# Altium PCB MB784.PCBDOC (part 3 of 4)
Units mil, origin at the board's own origin, x right, y up, seen from the top; angles counter-clockwise.
Board outline 4505 x 6805 mil, 4 copper layers (TopLayer, GND, S1, BottomLayer); 363 components, 323 nets, 1564 pads, 534 vias.
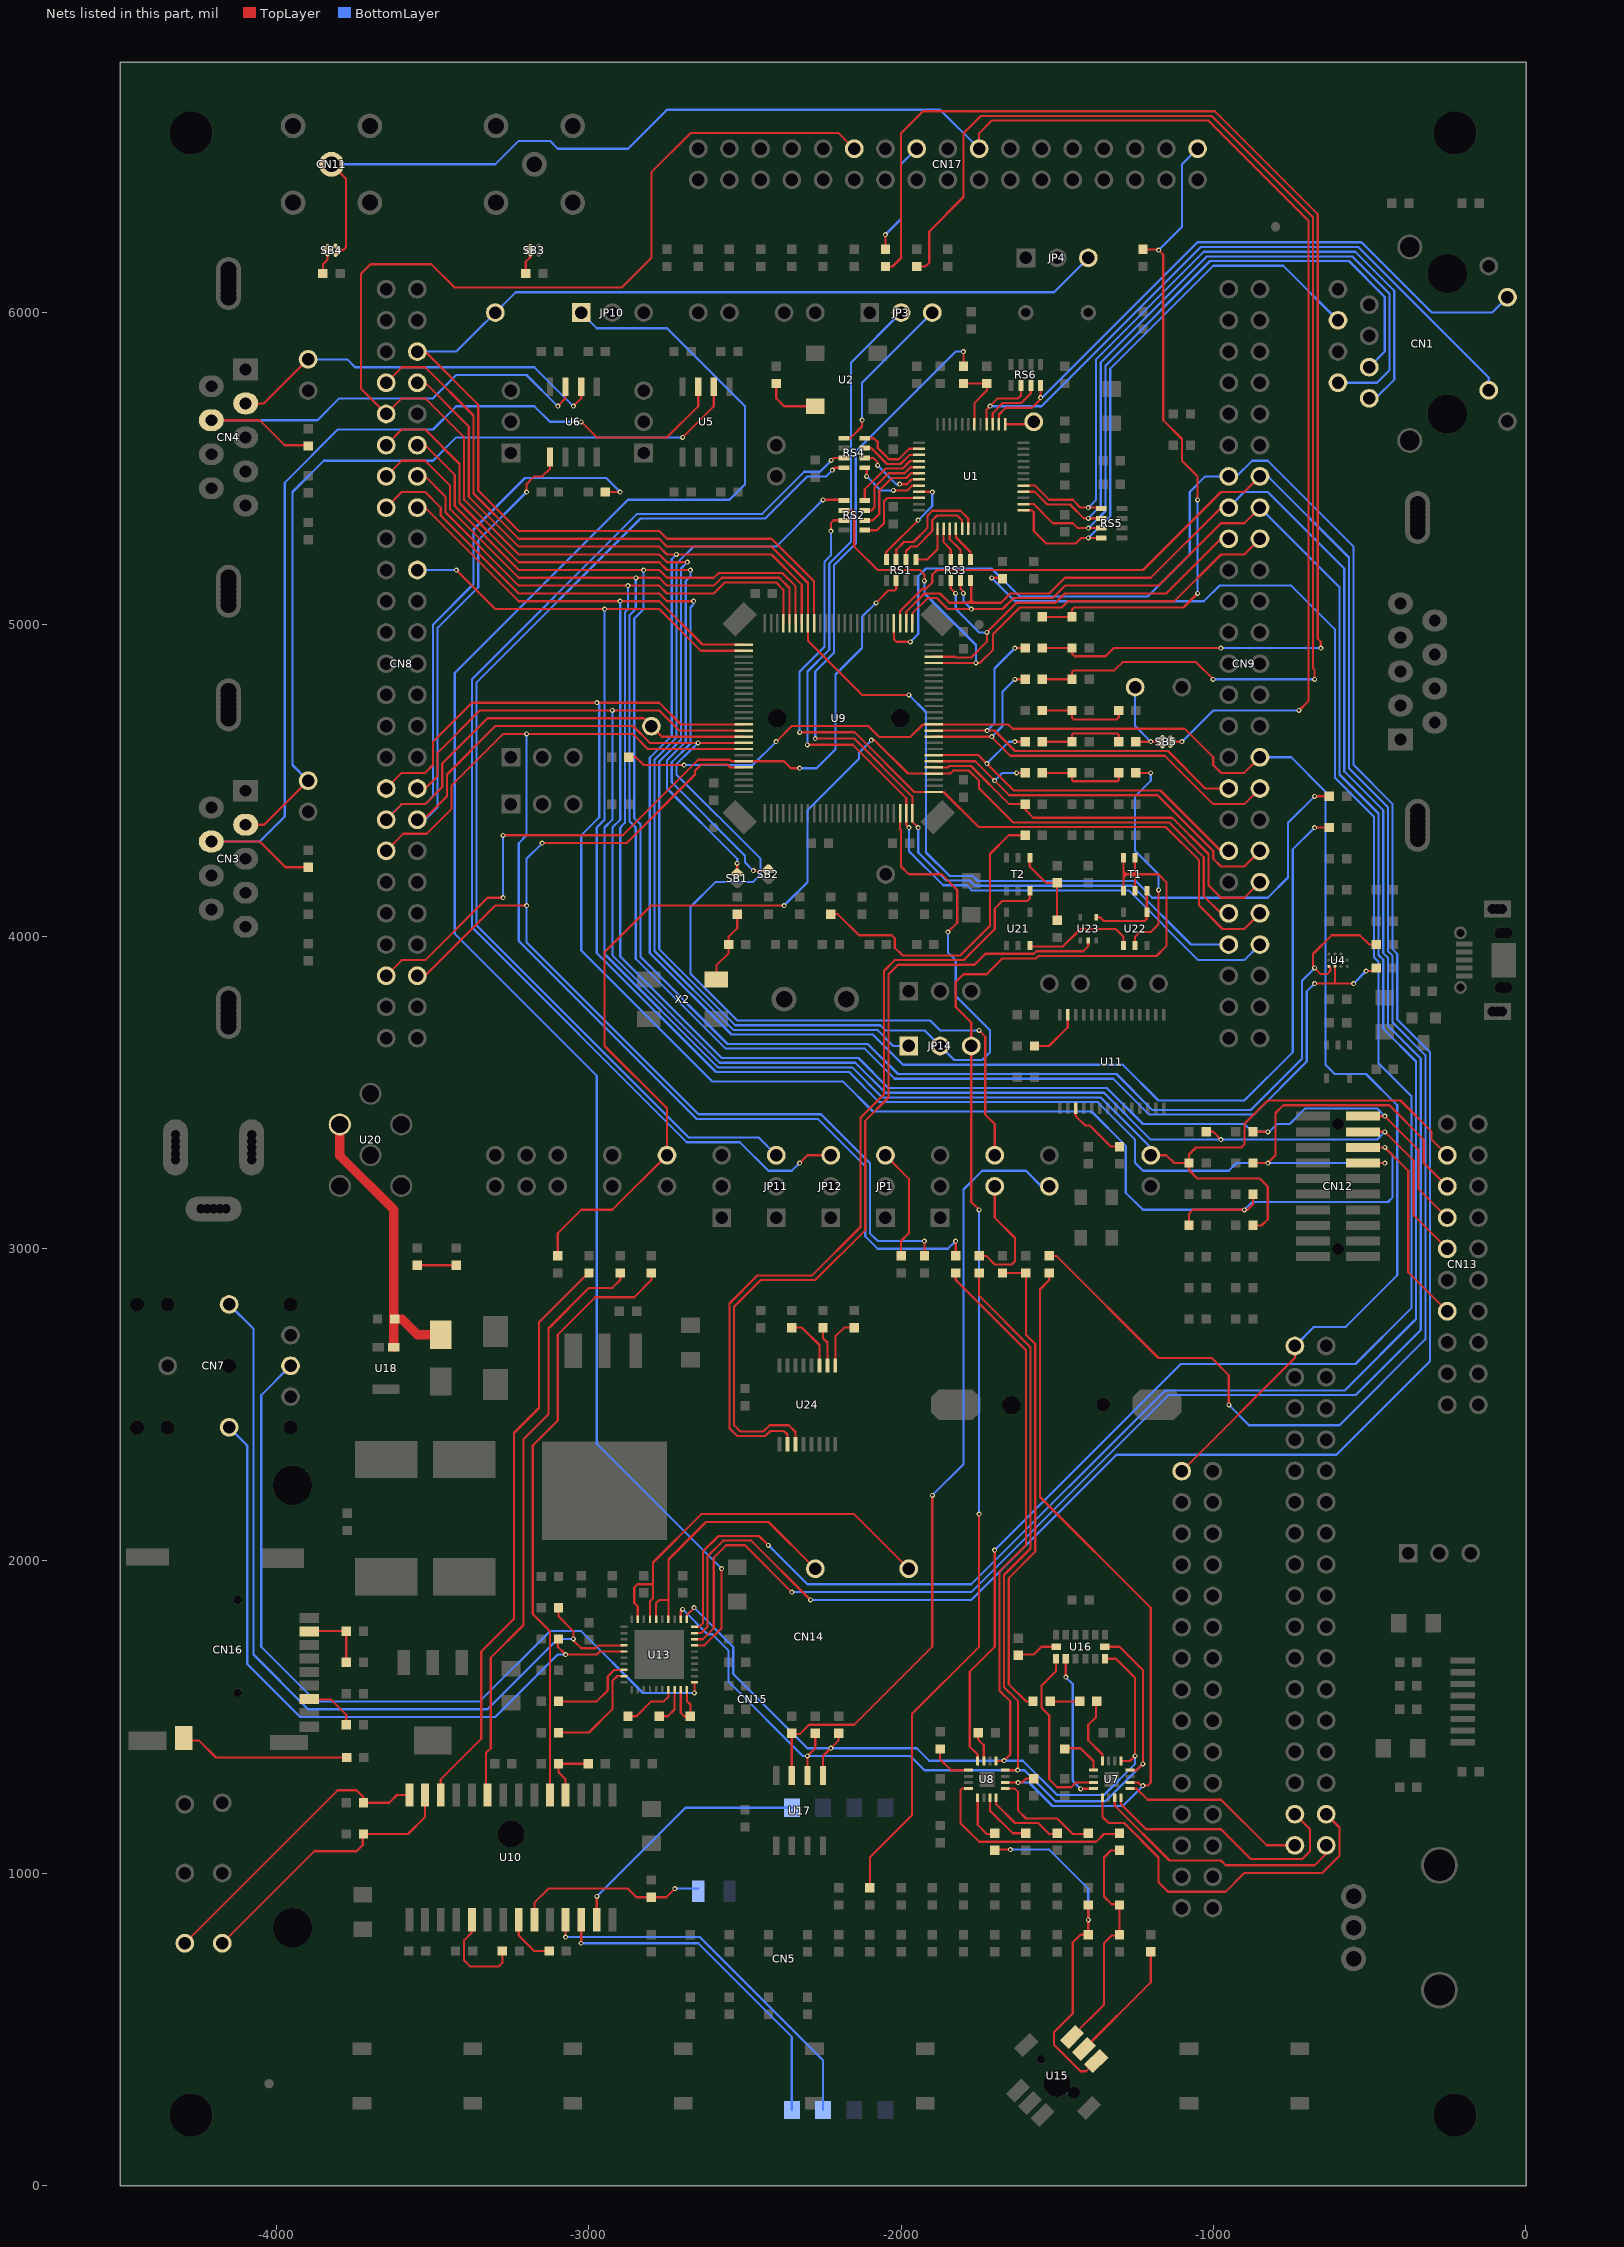
[diagram p5: the nets of this part, all layers, seen from the top]

## Via types
v1: diameter 16, hole 8, TopLayer to BottomLayer, tented both sides, 534 vias

## Nets (pads, with @x,y where several pads share a name; then routed paths per layer and width w, separated by ;. In a path a pad name is that pad's centre, name@x,y a point inside that pad or via, vN(x,y) a via of type N, cw(c..) or ccw(c..) an arc to the next point about the centre after c; other vN are vias at no path point) (continued)
NetR101_1: C55.2 R92.1 R101.1 U15.4 | length 1140.9
  TopLayer w7: R101.1@-1697.5,1075 v1(-1650,1075) ; C55.2@-1400,897.5 R92.1@-1400,802.5 -1425,802.5 -1450,777.5 -1450,550 -1510,490 -1510,450 -1425,365 -1407.05,365 U15.4@-1374.73,397.33
  BottomLayer w7: v1(-1650,1075) -1525,1075 -1400,950 v1(-1400,850)
NetR102_1: C56.2 R93.1 R102.1 U15.6 | length 737.3
  TopLayer w7: U15.6@-1452.67,475.27 -1350,577.95 -1350,775 -1325,800 R93.1@-1302.5,800 ; C56.2@-1302.5,900 -1325,900 -1350,925 -1350,1050 -1327.5,1072.5 R102.1@-1300,1072.5 ; R93.1@-1300,802.5 C56.2@-1300,897.5
NetR103_2: C60.2 R86.1 R103.2 | length 295
  TopLayer w7: R103.2@-1547.5,4725 C60.2@-1452.5,4725 -1452.5,4702.5 -1446.5,4696.5 -1308.5,4696.5 -1302.5,4702.5 R86.1@-1302.5,4725
NetR105_2: JP1.3 R105.2 | length 363.9
  TopLayer w7: JP1.3@-2050,3300 -1975,3225 -1975,3050 -2000,3025 R105.2@-2000,2977.5
NetR108_2: R108.2 U15.5 | length 399.7
  TopLayer w7: U15.5@-1413.7,436.3 -1200,650 R108.2@-1200,747.5
NetR112_1: R112.1 SB3.2 | length 81
  TopLayer w7: R112.1@-3202.5,6125 -3202.5,6162.5 -3188,6177 SB3.2@-3188,6200
NetR131_1: R131.1 R134.2 U7.4 U8.4 U13.2 U16.14 U17.6 | length 4274
  TopLayer w7: U13.2@-2706.1,1812.99 -2706.1,1838.9 v1(-2700,1845) ; U17.6@-2300,1312.5 v1(-2300,1375) -2275,1400 R134.2@-2275,1447.5 ; R131.1@-1750,2922.5 -1750,2850 -1585,2685 -1585,2040 -1670,1955 -1670,1595 -1625,1550 v1@-1625,1331.21 ; U8.4@-1666.26,1329.53 v1(-1626.69,1329.53) ; U16.14@-1347.24,1725 -1300,1725 -1225,1650 v1(-1225,1350) -1245.47,1329.53 U7.4@-1266.26,1329.53
  BottomLayer w7: v1(-2700,1845) -2620,1765 -2605,1765 -2552.5,1712.5 -2552.5,1612.5 -2315,1375 -1970.47,1375 -1925,1329.53 -1604.53,1329.53 -1505,1230 -1345,1230 v1(-1225,1350)
NetR131_2: JP9.2 R131.2 | length 397.5
  TopLayer w7: R131.2@-1750,2977.5 -1727.5,2977.5 -1700,2950 -1645,2950 -1635,2960 -1635,3035 -1700,3100 JP9.2@-1700,3200
NetR132_1: R132.1 R133.2 U7.5 U8.5 U13.1 U16.13 U17.5 | length 4143.2
  TopLayer w7: U13.1@-2686.42,1812.99 -2686.42,1826.71 v1(-2663.13,1850) ; U17.5@-2250,1312.5 -2250,1375 -2200,1425 R133.2@-2200,1447.5 ; R132.1@-1825,2922.5 -1825,2900 -1600,2675 -1600,2050 -1685,1965 -1685,1585 -1650,1550 -1650,1380 v1(-1670,1360) ; U8.5@-1695.47,1358.74 v1@-1671.26,1358.74 ; U16.13@-1346.26,1686.61 -1311.61,1686.61 -1250,1625 v1(-1250,1375) -1266.26,1358.74 U7.5@-1295.47,1358.74
  BottomLayer w7: v1(-2663.13,1850) -2537.5,1724.37 -2537.5,1637.5 -2300,1400 -1950,1400 -1910,1360 -1610,1360 -1500,1250 -1350,1250 -1250,1350 v1(-1250,1375)
  other v1: -2225,1400
NetR135_2: CN16.7 R135.2 | length 172.2
  TopLayer w7: CN16.7@-3896.65,1557.09 -3870,1557.09 -3868.42,1555.51 -3825.51,1555.51 -3777.5,1507.5 R135.2@-3777.5,1475
NetR136_1: CN16.2 R136.1 R138.1 | length 217.8
  TopLayer w7: CN16.2@-3895.28,1775 R136.1@-3777.5,1775 R138.1@-3777.5,1675
NetR137_2: CN16.10 R137.2 | length 551.4
  TopLayer w7: CN16.10@-4305,1425 -4250,1425 -4195,1370 R137.2@-3776.34,1370
NetR144_2: CN17.19 R144.2 | length 363.9
  TopLayer w7: R144.2@-2050,6202.5 v1(-2050,6250)
  BottomLayer w7: v1(-2050,6250) -2000,6300 -2000,6475 CN17.19@-1950,6525
NetR146_1: C61.2 CN17.1 R139.1 R146.1 | length 2121.3
  TopLayer w7: R139.1@-1547.5,5025 C61.2@-1452.5,5025 -1452.5,5047.5 -1445,5055 -1095,5055 v1(-1050,5100) ; R146.1@-1225,6202.5 -1177.5,6202.5 -1160,6185 -1160,5655 -1100,5595 -1100,5525 -1050,5475 v1(-1050,5400)
  BottomLayer w7: v1(-1175,6200) -1100,6275 -1100,6475 CN17.1@-1050,6525 ; v1(-1050,5100) v1(-1050,5400)
NetR148_1: LD7.1 R148.1 | length 125
  TopLayer w7: LD7.1@-3550,2947.5 R148.1@-3425,2947.5
NetR149_2: C78.1 R79.1 R149.2 | length 293.3
  TopLayer w7: R79.1@-1547.5,4525 C78.1@-1452.5,4525 -1452.5,4502.5 -1448.5,4498.5 -1306.5,4498.5 -1302.5,4502.5 R149.2@-1302.5,4525
NetR150_1: R150.1 R151.2 R154.2 | length 1540.4
  TopLayer w7: R150.1@-1675,2922.5 R154.2@-1600,2922.5 -1600,2725 -1570,2695 -1570,2030 -1655,1945 -1655,1605 -1600,1550 R151.2@-1577.5,1550
NetR151_1: R151.1 R163.2 | length 95
  TopLayer w7: R151.1@-1522.5,1550 R163.2@-1427.5,1550
NetR156_1: R156.1 R157.2 T2.4 | length 257.5
  TopLayer w7: T2.4@-1587.6,4253.15 -1587.6,4225 -1535.1,4172.5 R157.2@-1500,4172.5 R156.1@-1500,4052.5
NetR160_1: R159.2 R160.1 U7.2 U8.2 | length 2421.2
  TopLayer w7: U8.2@-1666.26,1290.16 v1@-1625,1290.16 ; v1(-1625,1290) -1612.5,1290 -1600,1302.5 R160.1@-1575,1302.5 ; R159.2@-1525,2922.5 -1525,2900 -1555,2870 -1555,2205 -1200,1850 -1200,1290 -1210,1280 -1230,1280 -1240.16,1290.16 U7.2@-1266.26,1290.16 U7.2@-1266.1,1290
  BottomLayer w7: v1(-1625,1290) -1590,1290 -1515,1215 -1290,1215 v1(-1225,1280)
NetR162_2: R8.1 R162.2 U1.30 | length 221.8
  TopLayer w7: R162.2@-1800,5772.5 R8.1@-1725,5772.5 -1725,5750 -1765.16,5709.84 U1.30@-1765.16,5642.32
NetR164_1: R164.1 U8.7 | length 98.6
  TopLayer w7: R164.1@-1752.5,1450 -1752.5,1427.5 -1734.84,1409.84 U8.7@-1734.84,1358.74
NetR165_2: R85.2 R165.2 | length 989.2
  TopLayer w7: R165.2@-2225,4072.5 -2202.5,4072.5 -2135,4005 -2030,4005 -2020,3995 -2020,3965 -1995,3940 -1810,3940 -1715,4035 -1715,4265 -1655,4325 R85.2@-1602.5,4325
NetR167_2: C65.2 R143.1 R167.2 | length 4196.5
  TopLayer w7: R143.1@-1950,6147.5 -1922.5,6147.5 -1910,6160 -1910,6260 -1800,6370 -1800,6575 -1745,6630 -1005,6630 -680,6305 -680,4860 -675,4855 v1(-675,4825) ; R167.2@-1547.5,4825 C65.2@-1452.5,4825 -1452.5,4847.5 -1446.5,4853.5 -1316.5,4853.5 -1290,4880 -1055,4880 v1(-1000,4825)
  BottomLayer w7: v1(-1000,4825) v1(-675,4825)
NetR168_2: C66.2 R144.1 R168.2 | length 4280.9
  TopLayer w7: R144.1@-2050,6147.5 -2027.5,6147.5 -2000,6175 -2000,6575 -1930,6645 -995,6645 -665,6315 -665,4955 -655,4945 v1(-655,4925) ; R168.2@-1547.5,4925 C66.2@-1452.5,4925 -1452.5,4907.5 -1443.5,4898.5 -1345,4898.5 -1318.5,4925 v1(-975,4925)
  BottomLayer w7: v1(-975,4925) v1(-655,4925)
NetR169_2: C64.2 R141.1 R169.2 | length 292.7
  TopLayer w7: R169.2@-1547.5,4625 C64.2@-1452.5,4625 -1452.5,4647.5 -1448.5,4651.5 -1307.5,4651.5 -1302.5,4646.5 R141.1@-1302.5,4625
NetRS1_1: RS1.1 U1.1 | length 149.2
  TopLayer w7: RS1.1@-1952.76,5208.5 -1916.5,5208.5 -1883.27,5241.73 U1.1@-1883.27,5307.68
NetRS1_3: RS1.3 U1.5 | length 308.1
  TopLayer w7: RS1.3@-1984.25,5208.5 -1984.25,5235.75 -1970,5250 -1950,5250 -1900,5300 -1900,5335 -1885,5350 -1820,5350 -1804.53,5334.53 U1.5@-1804.53,5307.68
NetRS1_5: RS1.5 U1.6 | length 380.2
  TopLayer w7: RS1.5@-2015.75,5208.5 -2015.75,5240 -1990.75,5265 -1960,5265 -1915,5310 -1915,5350 -1900,5365 -1810,5365 -1784.84,5339.84 U1.6@-1784.84,5307.68
NetRS1_7: RS1.7 U1.45 | length 320.1
  TopLayer w7: RS1.7@-2047.24,5208.5 -2047.24,5232.76 v1(-1945,5335) ; U1.45@-1942.32,5425.79 -1900.79,5425.79 v1(-1900,5425)
  BottomLayer w7: v1(-1945,5335) -1900,5380 v1(-1900,5425)
NetRS2_1: RS2.1 U1.46 | length 258
  TopLayer w7: RS2.1@-2116.5,5302.76 -2077.24,5302.76 -2055,5325 -2055,5395 -2043.9,5406.1 U1.46@-1942.32,5406.1
NetRS2_3: RS2.3 U1.42 | length 280.9
  TopLayer w7: RS2.3@-2116.5,5334.25 -2090,5334.25 -2070,5354.25 -2070,5430 -2030.01,5469.99 -1982.91,5469.99 -1968.06,5484.84 U1.42@-1942.32,5484.84
NetRS2_5: RS2.5 U1.41 | length 269.3
  TopLayer w7: RS2.5@-2116.5,5365.75 -2095,5365.75 -2085,5375.75 -2085,5440 -2040.01,5484.99 -1989.12,5484.99 -1969.58,5504.53 U1.41@-1942.32,5504.53
NetRS2_7: RS2.7 U1.40 | length 248
  TopLayer w7: RS2.7@-2116.5,5397.24 -2116.5,5433.5 -2050.01,5499.99 -1995.33,5499.99 -1971.11,5524.21 U1.40@-1942.32,5524.21
NetRS2_8: JP14.1 RS2.8 | length 2835.8
  TopLayer w7: v1(-2250,5400) RS2.8@-2180,5400
  BottomLayer w7: v1(-2250,5400) -2400,5250 -2665,5250 -2720,5195 -2720,4637.57 -2790,4567.57 -2790,3954.12 -2537.38,3701.5 -2076.5,3701.5 -2025,3650 JP14.1@-1975,3650
NetRS3_1: RS3.1 U1.4 | length 118.4
  TopLayer w7: U1.4@-1824.21,5307.68 -1824.21,5279.21 -1777.76,5232.76 RS3.1@-1777.76,5208.5
NetRS3_3: RS3.3 U1.3 | length 113.5
  TopLayer w7: U1.3@-1843.9,5307.68 -1843.9,5273.9 -1809.25,5239.25 RS3.3@-1809.25,5208.5
NetRS3_5: RS3.5 U1.2 | length 108.6
  TopLayer w7: U1.2@-1863.58,5307.68 -1863.58,5263.58 -1840.75,5240.75 RS3.5@-1840.75,5208.5
NetRS4_1: RS4.1 U1.44 | length 222.7
  TopLayer w7: v1(-2110,5475) RS4.1@-2110,5505 ; v1(-2025,5430) -1980.47,5430 -1965,5445.47 U1.44@-1942.32,5445.47
  BottomLayer w7: v1(-2110,5475) -2065,5430 v1(-2025,5430)
NetRS4_2: JP11.3 RS4.2 | length 3505.1
  TopLayer w7: v1(-2220,5495) -2212.24,5502.76 RS4.2@-2183.5,5502.76
  BottomLayer w7: JP11.3@-2400,3300 -2456.5,3356.5 -2680.29,3356.5 -3360,4036.21 -3360,4815 -2835,5340 -2435,5340 -2300,5475 -2240,5475 v1(-2220,5495)
NetRS4_3: RS4.3 U1.43 | length 221.2
  TopLayer w7: RS4.3@-2116.5,5534.25 -2089.25,5534.25 -2075,5520 v1(-2075,5510) ; v1(-2005,5450) -1981.69,5450 -1966.53,5465.16 U1.43@-1942.32,5465.16
  BottomLayer w7: v1(-2075,5510) -2015,5450 v1(-2005,5450)
NetRS4_4: JP12.3 RS4.4 | length 3774.1
  TopLayer w7: v1(-2325,3275) -2300,3300 JP12.3@-2225,3300 ; v1(-2224,5526) -2215.75,5534.25 RS4.4@-2183.5,5534.25
  BottomLayer w7: v1(-2325,3275) -2350,3250 -2425,3250 -2516.5,3341.5 -2686.5,3341.5 -3375,4030 -3375,4825 -2845,5355 -2445,5355 -2310,5490 -2260,5490 v1(-2224,5526)
NetRS4_5: RS4.5 U1.39 | length 207.2
  TopLayer w7: RS4.5@-2116.5,5565.75 -2095.75,5565.75 -2044.99,5514.99 -2001.55,5514.99 -1972.64,5543.9 U1.39@-1942.32,5543.9
NetRS4_7: RS4.7 U1.38 | length 227
  TopLayer w7: RS4.7@-2116.5,5597.24 -2087.24,5597.24 -2075,5585 -2075,5566.21 -2038.78,5529.99 -2007.76,5529.99 -1974.17,5563.58 U1.38@-1942.32,5563.58
NetRS4_8: JP3.3 RS4.8 | length 532.3
  TopLayer w7: RS4.8@-2183.5,5597.24 -2162.76,5597.24 -2125,5635 v1(-2125,5655)
  BottomLayer w7: v1(-2125,5655) -2125,5775 JP3.3@-1900,6000
NetSB1_2: CN8.11 SB1.2 | length 2342.8
  TopLayer w7: CN8.11@-3650,5575 -3600,5625 -3525,5625 -3415,5515 -3415,5390 -3225,5200 -2775,5200 -2750,5175 v1(-2675,5175) ; SB1.2@-2525,4211.81 v1(-2525,4235)
  BottomLayer w7: v1(-2675,5175) -2675,5155 -2690,5140 -2690,4625.15 -2750,4565.15 -2750,4475 -2525,4250 v1(-2525,4235)
NetSB2_2: CN8.15 SB2.2 | length 2214.1
  TopLayer w7: CN8.15@-3650,5375 -3600,5425 -3525,5425 -3475,5375 -3475,5350 -3225,5100 -2775,5100 -2750,5075 v1(-2665,5075) ; v1(-2473.19,4211.81) SB2.2@-2425,4211.81
  BottomLayer w7: v1(-2665,5075) -2665,5065 -2675,5055 -2675,4618.93 -2735,4558.93 -2735,4495 -2500,4260 -2500,4238.62 v1(-2473.19,4211.81)
NetSB4_1: CN11.5 CN17.15 SB4.1 SB5.2 | length 5820.3
  TopLayer w7: CN11.5@-3825,6475 -3778.19,6428.19 -3778.19,6210 -3788.19,6200 SB4.1@-3800,6200 ; CN17.15@-1750,6525 -1750,6575 -1710,6615 -1015,6615 -695,6295 -695,4755 v1(-725,4725) ; SB5.2@-1137,4625 v1(-1100,4625)
  BottomLayer w7: CN11.5@-3825,6475 -3300,6475 -3225,6550 -3125,6550 -3100,6525 -2875,6525 -2750,6650 -1875,6650 CN17.15@-1750,6525 ; v1(-1100,4625) -1000,4725 v1(-725,4725)
NetSB4_2: R113.1 SB4.2 | length 81
  TopLayer w7: R113.1@-3852.5,6125 -3852.5,6155 -3838,6169.5 SB4.2@-3838,6200
NetT1_5: JP14.3 R116.2 T1.1 T1.2 T1.5 T1.6 | length 4451.4
  TopLayer w7: R116.2@-2100,952.5 -2100,1050 -1965,1185 -1965,1510 -1750,1725 v1(-1750,2150) ; v1(-1750,3125) -1775,3150 -1775,3725 -1825,3775 -1825,3855 -1800,3880 -1726.21,3880 -1675.86,3930.35 -1568.44,3930.35 -1560.29,3938.5 -1181.5,3938.5 -1150,3970 -1150,4175 -1175,4200 -1287.4,4200 ; T1.1@-1287.4,4146.85 T1.6@-1287.4,4253.15 ; -1287.4,4190 -1277.4,4200 -1287.4,4210 ; T1.2@-1250,4146.85 T1.5@-1250,4253.15 ; -1260,4200 -1250,4190 -1240,4200 -1250,4210 -1260,4200
  BottomLayer w7: v1(-1750,2150) v1(-1750,3125)
NetT2_3: T2.3 U24.2 | length 2637.7
  TopLayer w7: U24.2@-2363.98,2374.02 -2363.98,2405 -2375.46,2416.48 -2418.52,2416.48 -2435,2400 -2525,2400 -2550,2425 -2550,2825 -2460,2915 -2285,2915 -2130,3070 -2130,3420 -2055,3495 -2055,3890 -2020,3925 -1800,3925 -1700,4025 -1700,4090 -1675,4115 -1595,4115 -1587.6,4122.4 T2.3@-1587.6,4146.85
NetTP1_1: TP1.1 U1.25 | length 84.1
  TopLayer w7: U1.25@-1666.73,5642.32 TP1.1@-1582.68,5642.32
NetTP8_1: R141.2 SB5.1 TP8.1 | length 273.2
  TopLayer w7: R141.2@-1247.5,4625 SB5.1@-1170,4625
  BottomLayer w7: TP8.1@-1250,4800 -1250,4675 v1(-1200,4625)
NetU1_13: CN1.6 RS5.2 U1.13 | length 1853.4
  TopLayer w7: U1.13@-1607.68,5366.73 -1581.73,5366.73 -1575,5360 -1575,5300 -1535,5260 -1440,5260 -1422.24,5277.76 RS5.2@-1358.5,5277.76
  BottomLayer w7: v1(-1400,5277.76) -1330,5347.76 -1330,5820 -1000,6150 -775,6150 CN1.6@-595,5970
NetU1_14: CN1.3 RS5.4 U1.14 | length 2151.8
  TopLayer w7: U1.14@-1607.68,5386.42 -1575,5386.42 -1513.58,5325 -1450,5325 -1434.25,5309.25 RS5.4@-1358.5,5309.25
  BottomLayer w7: v1(-1400,5309.25) -1345,5364.25 -1345,5830 -1010,6165 -565,6165 -450,6050 -450,5875 CN1.3@-500,5825
NetU1_16: CN1.2 RS5.6 U1.16 | length 2342.3
  TopLayer w7: U1.16@-1607.68,5425.79 -1572,5425.79 -1531.21,5385 -1458.62,5385 -1414.37,5340.75 RS5.6@-1358.5,5340.75
  BottomLayer w7: v1(-1400,5340.75) -1360,5380.75 -1360,5840 -1020,6180 -555,6180 -435,6060 -435,5815 -475,5775 CN1.2@-600,5775
NetU1_17: CN1.1 RS5.8 U1.17 | length 2300.5
  TopLayer w7: U1.17@-1607.68,5445.47 -1570.47,5445.47 -1525,5400 -1450,5400 -1425,5375 RS5.8@-1361.26,5375
  BottomLayer w7: v1(-1400,5375) -1375,5400 -1375,5850 -1030,6195 -545,6195 -420,6070 -420,5785 -480,5725 CN1.1@-500,5725
NetU1_26: CN1.11 RS6.2 U1.26 | length 2044.2
  TopLayer w7: U1.26@-1686.42,5642.32 -1686.42,5673.58 -1665,5695 -1580.51,5695 -1552.76,5722.76 RS6.2@-1552.76,5766.5
  BottomLayer w7: v1(-1552.76,5727.76) -1547.24,5727.76 -1050,6225 -525,6225 -300,6000 -106,6000 CN1.11@-57,6049
NetU1_27: RS6.4 U1.27 | length 209.1
  TopLayer w7: U1.27@-1706.1,5642.32 -1706.1,5677.68 -1673.79,5710 -1615,5710 -1584.25,5740.75 RS6.4@-1584.25,5766.5
NetU1_28: CN1.10 RS6.6 U1.28 | length 2231.2
  TopLayer w7: U1.28@-1725.79,5642.32 -1725.79,5689.21 -1690,5725 -1625,5725 -1615.75,5734.25 RS6.6@-1615.75,5766.5
  BottomLayer w7: v1(-1715,5700) -1550,5700 -1040,6210 -535,6210 -117,5792 CN1.10@-117,5751
NetU2_1: R32.2 U2.1 | length 182.9
  TopLayer w7: R32.2@-2400,5772.5 -2400,5725 -2375,5700 U2.1@-2275,5700
NetU5_6: CN3.2 JP5.2 U5.6 | length 2730.5
  TopLayer w7: CN3.2@-4100,4359 -4041,4359 JP5.2@-3900,4500 ; v1(-2700,5600) -2600,5700 U5.6@-2600,5762.5
  BottomLayer w7: JP5.2@-3900,4500 -3950,4550 -3950,5425 -3850,5525 -3500,5525 -3425,5600 v1(-2700,5600)
NetU5_7: CN3.7 R52.1 U5.7 | length 3254.1
  TopLayer w7: CN3.7@-4210,4305 -4055,4305 -3972.5,4222.5 R52.1@-3900,4222.5 ; v1(-3025,5650) -2975,5600 -2750,5600 -2650,5700 U5.7@-2650,5762.5
  BottomLayer w7: CN3.7@-4210,4305 -4055,4305 -3975,4385 -3975,5455 -3805,5625 -3500,5625 -3425,5700 -3175,5700 -3125,5650 v1(-3025,5650)
NetU6_6: CN4.2 JP6.2 U6.6 | length 1243.4
  TopLayer w7: CN4.2@-4100,5709 -4041,5709 JP6.2@-3900,5850 ; v1(-3050,5700) -3025,5725 U6.6@-3025,5762.5
  BottomLayer w7: JP6.2@-3900,5850 -3775,5850 -3750,5825 -3175,5825 v1(-3050,5700)
NetU6_7: CN4.7 R53.1 U6.7 | length 1625
  TopLayer w7: CN4.7@-4210,5655 -4055,5655 -3975,5575 R53.1@-3902.5,5575 ; v1(-3100,5700) -3075,5725 U6.7@-3075,5762.5
  BottomLayer w7: CN4.7@-4210,5655 -3870,5655 -3800,5725 -3500,5725 -3425,5800 -3200,5800 v1(-3100,5700)
NetU7_1: CN14.33 U7.1 | length 603.5
  TopLayer w7: U7.1@-1266.26,1270.47 -1245.47,1270.47 -1210,1235 -975,1235 -828.72,1088.72 CN14.33@-738.06,1088.72
NetU7_8: R163.1 U7.8 | length 218
  TopLayer w7: R163.1@-1375,1547.5 -1375,1500 -1400,1475 -1400,1425 -1354.53,1379.53 U7.8@-1354.53,1358.74
NetU7_9: R57.1 U7.9 | length 135.1
  TopLayer w7: R57.1@-1472.5,1400 -1425,1400 -1383.74,1358.74 U7.9@-1383.74,1329.53
NetU7_11: U7.11 U16.8 | length 574
  TopLayer w7: U16.8@-1503.74,1686.61 -1503.74,1646.26 -1550,1600 -1550,1530 -1525,1505 -1525,1300 -1500,1275 -1455,1275 -1439.84,1290.16 U7.11@-1383.74,1290.16
NetU7_12: U7.12 U16.9 | length 477
  TopLayer w7: v1(-1472.24,1627.76) U16.9@-1472.24,1686.61 ; v1(-1425,1270) U7.12@-1384.21,1270
  BottomLayer w7: v1(-1472.24,1627.76) -1450,1605.51 -1450,1295 v1(-1425,1270)
NetU7_13: CN14.32 U7.13 | length 1166.5
  TopLayer w7: U7.13@-1354.53,1241.26 -1354.53,1179.53 -1335,1160 -1285,1160 -1175,1050 -1175,970 -1145,940 -960,940 -900,1000 -650,1000 -595,1055 -595,1145.65 CN14.32@-638.06,1188.72
NetU7_15: CN14.34 U7.15 | length 824
  TopLayer w7: U7.15@-1315.16,1241.26 -1315.16,1215.16 -1140,1040 -975,1040 -960,1025 -675,1025 -638.06,1061.94 CN14.34@-638.06,1088.72
NetU7_16: CN14.31 U7.16 | length 847.9
  TopLayer w7: U7.16@-1295.47,1241.26 -1295.47,1220.47 -1215,1140 -975,1140 -880,1045 -715,1045 -690,1070 -690,1140.65 CN14.31@-738.06,1188.72
NetU8_1: R98.2 U8.1 | length 359.2
  TopLayer w7: U8.1@-1666.26,1270.47 -1635.47,1270.47 -1625,1260 -1625,1200 -1600,1175 -1500,1175 -1450,1125 R98.2@-1402.5,1125
NetU8_8: R41.1 U8.8 | length 5894.7
  TopLayer w7: U8.8@-1754.53,1358.74 -1754.53,1379.53 -1780,1405 -1780,1645 -1700,1725 v1(-1700,2035) ; v1(-1710,5150) R41.1@-1677.5,5150
  BottomLayer w7: v1(-1710,5150) -1635,5075 -1030,5075 -980,5125 -750,5125 -610,4985 -610,4510 -485,4385 -485,3935 -470,3920 -470,3595 -365,3490 -365,2810 -544,2631 -1104,2631 v1(-1700,2035)
NetU8_9: R58.1 U8.9 | length 138.5
  TopLayer w7: R58.1@-1875,1397.5 -1875,1365 -1839.53,1329.53 U8.9@-1783.74,1329.53
NetU8_12: R102.2 U8.12 | length 676.2
  TopLayer w7: U8.12@-1783.74,1270.47 -1804.53,1270.47 -1810,1265 -1810,1160 -1750,1100 -1375,1100 -1350,1125 R102.2@-1302.5,1125
NetU8_13: R101.2 U8.13 | length 151
  TopLayer w7: U8.13@-1754.53,1241.26 -1754.53,1154.53 -1725,1125 R101.2@-1702.5,1125
NetU8_15: R100.2 U8.15 | length 186.4
  TopLayer w7: U8.15@-1715.16,1241.26 -1715.16,1200 -1642.66,1127.5 R100.2@-1600,1127.5
NetU8_16: R99.2 U8.16 | length 253.3
  TopLayer w7: U8.16@-1695.47,1241.26 -1695.47,1220.47 -1635,1160 -1560,1160 -1525,1125 R99.2@-1502.5,1125
NetU10_5: C20.2 U10.5 | length 313.8
  TopLayer w7: U10.5@-3375,850 -3375,810 -3400,785 -3400,720 -3380,700 -3290,700 -3277.5,712.5 C20.2@-3277.5,750
NetU10_8: C22.1 U10.8 | length 168.2
  TopLayer w7: U10.8@-3225,850 -3225,800 -3175,750 C22.1@-3127.5,750
NetU10_9: CN5.18 R70.2 U10.9 | length 621.4
  TopLayer w7: U10.9@-3175,850 -3175,905 -3130,950 -2875,950 -2847.5,922.5 -2752.5,922.5 v1(-2725,950)
  BottomLayer w7: v1(-2725,950) CN5.18@-2650,950
NetU10_11: CN5.7 U10.11 | length 1202.9
  TopLayer w7: v1(-3075,795) U10.11@-3075,850
  BottomLayer w7: v1(-3075,795) -2645,795 -2250,400 CN5.7@-2250,240.75
NetU10_12: CN5.8 U10.12 | length 1108.5
  TopLayer w7: v1(-3025,775) U10.12@-3025,850
  BottomLayer w7: v1(-3025,775) -2650,775 -2350,475 CN5.8@-2350,240.75
NetU10_13: CN5.4 U10.13 | length 817.7
  TopLayer w7: U10.13@-2975,850 v1(-2975,925)
  BottomLayer w7: v1(-2975,925) -2690.75,1209.25 CN5.4@-2350,1209.25
NetU10_18: R66.2 R67.1 U10.18 | length 204.3
  TopLayer w7: U10.18@-3075,1250 -3075,1300 -3097.5,1322.5 R66.2@-3097.5,1350 R67.1@-3002.5,1350
NetU10_19: R166.2 U10.19 | length 1925.9
  TopLayer w7: U10.19@-3125,1250 -3125,1775 -3180,1830 -3180,2370 -3100,2450 -3100,2725 -2980,2845 -2855,2845 -2800,2900 R166.2@-2800,2922.5
NetU10_23: R69.2 U10.23 | length 1889.5
  TopLayer w7: U10.23@-3330,1255 -3330,1385 -3315,1400 -3315,1690 -3210,1795 -3210,2390 -3130,2470 -3130,2745 -3000,2875 -2925,2875 -2900,2900 R69.2@-2900,2922.5
NetU10_26: R68.1 U10.26 | length 1870.7
  TopLayer w7: U10.26@-3475,1250 -3475,1300 -3345,1430 -3345,1710 -3240,1815 -3240,2410 -3160,2490 -3160,2765 -3002.5,2922.5 R68.1@-3000,2922.5
NetU10_27: R65.2 TP3.1 U10.27 | length 906.8
  TopLayer w7: TP3.1@-4175,775 -3880,1070 -3745,1070 -3725,1090 -3725,1122.5 R65.2@-3722.5,1125 -3580,1125 -3525,1180 U10.27@-3525,1250
NetU10_28: R64.2 TP2.1 U10.28 | length 960.1
  TopLayer w7: TP2.1@-4295,775 -3805,1265 -3745,1265 -3722.5,1242.5 R64.2@-3722.5,1225 -3640,1225 -3615,1250 U10.28@-3575,1250
NetU11_3: C33.1 U11.3 | length 205.8
  TopLayer w7: U11.3@-1440.16,3450.39 -1440.16,3425.16 -1410,3395 -1395,3395 -1327.5,3327.5 C33.1@-1300,3327.5
NetU11_27: C32.1 U11.27 | length 171.2
  TopLayer w7: C32.1@-1572.5,3650 -1525.75,3650 -1465.75,3710 U11.27@-1465.75,3749.61
NetU13_4: U13.4 U13.6 U25.1 | length 870
  TopLayer w7: U13.6@-2784.84,1812.99 -2784.84,1865.16 -2775,1875 -2745.47,1875 ; U13.4@-2745.47,1812.99 -2745.47,2004.53 -2625,2125 -2424.61,2125 U25.1@-2274.61,1975
NetU13_7: U13.7 U13.9 U25.2 | length 1313
  TopLayer w7: U13.9@-2843.9,1812.99 -2843.9,1853.9 -2855,1865 -2855,1915 -2845,1925 -2795,1925 ; U13.7@-2804.53,1812.99 -2804.53,1871 -2795,1880.53 -2795,1995 -2640,2150 -2150.39,2150 U25.2@-1975.39,1975
NetU13_14: C43.2 CN7.3 U13.14 | length 2645.9
  TopLayer w7: C43.2@-3097.5,1850 -3097.5,1822.5 -3050,1775 -3050,1745 -3025,1720 -2980,1720 -2970.47,1729.53 U13.14@-2887.99,1729.53
  BottomLayer w7: CN7.3@-4153.15,2821.85 -4075,2743.7 -4075,1700 -3900,1525 -3325,1525 -3100,1750 v1(-3050,1750)
NetU13_15: C44.2 CN7.2 U13.15 | length 2208.9
  TopLayer w7: CN7.2@-4153.15,2428.15 CN7.2@-4150,2425 ; C44.2@-3100,1747.5 -3100,1725 v1(-3075,1700) -2975,1700 -2965.16,1709.84 U13.15@-2887.99,1709.84
  BottomLayer w7: CN7.2@-4153.15,2428.15 -4095,2370 -4095,1670 -3925,1500 -3300,1500 -3100,1700 v1(-3075,1700)
NetU13_18: C49.2 U13.18 | length 277.6
  TopLayer w7: C49.2@-3097.5,1550 -2975,1550 -2940,1585 -2940,1630 -2919.21,1650.79 U13.18@-2887.99,1650.79
NetU13_19: C50.2 U13.19 | length 337.2
  TopLayer w7: C50.2@-3097.5,1450 -3000,1450 -2925,1525 -2925,1615 -2908.9,1631.1 U13.19@-2887.99,1631.1
NetU13_27: C93.2 U13.27 | length 177.4
  TopLayer w7: C93.2@-2875,1502.5 -2847.5,1502.5 -2800,1550 -2760.47,1550 -2745.47,1565 U13.27@-2745.47,1587.01
NetU13_28: C94.2 U13.28 | length 121
  TopLayer w7: C94.2@-2775,1502.5 -2747.5,1502.5 -2725.79,1524.21 U13.28@-2725.79,1587.01
NetU13_29: R80.2 U13.29 U13.30 | length 198.3
  TopLayer w7: U13.29@-2706.1,1587.01 -2706.1,1513.6 -2695,1502.5 R80.2@-2675,1502.5 -2675,1540 -2686.42,1551.42 U13.30@-2686.42,1587.01
NetU13_31: CN7.5 U13.31 | length 2608.9
  TopLayer w7: v1(-2662.01,1577.01) U13.31@-2662.01,1611.42
  BottomLayer w7: CN7.5@-3956.3,2625 -4050,2531.3 -4050,1725 -3875,1550 -3350,1550 -3125,1775 -3025,1775 -2827.01,1577.01 v1(-2662.01,1577.01)
NetU13_37: JP10.1 U13.37 | length 5604
  TopLayer w7: U13.37@-2662.01,1729.53 -2630.47,1729.53 -2575,1785 v1(-2575,1975)
  BottomLayer w7: JP10.1@-3025,6000 -2975,5950 -2750,5950 -2500,5700 -2500,5450 -2550,5400 -2875,5400 -3430,4845 -3430,4010 -2975,3555 -2975,2375 v1(-2575,1975)
NetU16_7: R106.2 U16.7 | length 130.1
  TopLayer w7: R106.2@-1622.5,1700 -1575,1700 -1550,1725 U16.7@-1502.76,1725
NetU17_7: JP17.1 R107.2 U17.7 | length 2535.5
  TopLayer w7: R107.2@-2360,1445 -2325,1445 -2295,1475 -2150,1475 -1900,1725 v1(-1900,2210) ; U17.7@-2350,1312.5 R107.2@-2350,1445
  BottomLayer w7: v1(-1900,2210) -1800,2310 -1800,3190 -1740,3250 -1600,3250 -1550,3200 JP17.1@-1525,3200
NetU18_3: C77.1 U18.3 U20.1 Z1.2 | length 945.1
  TopLayer w30: U20.1@-3798.43,3390 -3798.43,3298.43 -3625,3125 U18.3@-3625,2685 ; C77.1@-3622.5,2775 -3600,2775 -3549.8,2724.8 Z1.2@-3475,2724.8
NetU21_3: U21.3 U22.1 | length 358.8
  TopLayer w7: U21.3@-1584.25,3968.5 -1481.5,3968.5 -1425,4025 -1312.4,4025 -1287.4,4000 U22.1@-1287.4,3971.85
NetU22_2: R149.1 U22.2 | length 704
  TopLayer w7: U22.2@-1250,3971.85 -1250,4000 -1235,4015 -1200,4015 -1175,4040 v1(-1175,4150) ; R149.1@-1247.5,4525 v1(-1200,4525)
  BottomLayer w7: v1(-1200,4525) -1200,4500 -1250,4450 -1250,4275 -1175,4200 v1(-1175,4150)
NetU23_2: U23.2 U24.3 | length 2708.9
  TopLayer w7: U24.3@-2338.39,2374.02 -2338.39,2413.39 -2360,2435 -2421.21,2435 -2441.21,2415 -2515,2415 -2535,2435 -2535,2815 -2450,2900 -2275,2900 -2115,3060 -2115,3410 -2040,3485 -2040,3880 -2010,3910 -1765,3910 -1729.65,3945.35 -1574.65,3945.35 -1566.5,3953.5 -1416.5,3953.5 -1400,3970 U23.2@-1400,3987.6
NetU23_4: T1.3 U22.4 U23.4 | length 259.5
  TopLayer w7: U23.4@-1374.41,4062.4 -1362.4,4062.4 -1350,4050 -1220,4050 -1212.6,4057.4 T1.3@-1212.6,4146.85
NetU24_9: C88.1 U24.9 | length 165.6
  TopLayer w7: U24.9@-2210.43,2625.98 -2210.43,2719.57 -2182.5,2747.5 C88.1@-2150,2747.5
NetU24_10: R158.1 U24.10 | length 127.3
  TopLayer w7: R158.1@-2250,2747.5 -2250,2713.98 -2236.02,2700 U24.10@-2236.02,2625.98
NetU24_11: R153.1 U24.11 | length 177.2
  TopLayer w7: R153.1@-2350,2747.5 -2317.5,2747.5 -2261.61,2691.61 U24.11@-2261.61,2625.98
NetX2_1: C16.1 R161.1 X2.1 | length 237.1
  TopLayer w7: X2.1@-2591.73,3862.99 -2591.73,3908.27 -2552.5,3947.5 -2552.5,4000 -2525,4027.5 R161.1@-2525,4072.5
PA0: CN8.9 CN17.23 JP14.2 U9.23 | length 7279.9
  TopLayer w7: v1(-2685,5200) -2750,5200 -2775,5225 -3225,5225 -3400,5400 -3400,5600 -3525,5725 -3600,5725 CN8.9@-3650,5675 -3730,5755 -3730,6125 -3700,6155 -3505,6155 -3430,6080 -2895,6080 -2800,6175 -2800,6450 -2675,6575 -2200,6575 CN17.23@-2150,6525 ; U9.23@-2003.15,4395.87 -2003.15,4345.32 -2000,4342.17 -2000,4225 -1975,4200 -1870,4200 -1820,4150 -1820,4045 v1(-1850,4015)
  BottomLayer w7: v1(-2685,5200) -2705,5180 -2705,4631.36 -2775,4561.36 -2775,3960.33 -2531.17,3716.5 -2066.5,3716.5 -2050,3700 -1925,3700 -1830,3605 -1740,3605 -1715,3630 -1715,3700 -1825,3810 -1825,3925 -1850,3950 v1(-1850,4015)
PA1: CN9.44 JP3.2 U9.24 | length 3359.5
  TopLayer w7: v1(-2300,4615) -2155,4615 -1983.46,4443.46 -1983.46,4358.46 v1(-1975,4350)
  BottomLayer w7: v1(-2300,4615) -2300,4850 -2230,4920 -2230,5196.21 -2160,5266.21 -2160,5840 JP3.2@-2000,6000 ; v1(-1975,4350) -1975,4275 -1865,4165 -1790,4165 -1773.5,4148.5 -1270.93,4148.5 -1047.43,3925 -900,3925 CN9.44@-850,3975
PA2: CN9.43 R162.1 U9.25 | length 3191
  TopLayer w7: v1(-2275,4635) -2150,4635 -1963.78,4448.78 -1963.78,4368.78 v1(-1945,4350) ; R162.1@-1800,5827.5 v1(-1800,5875)
  BottomLayer w7: v1(-2275,4635) -2275,4850 -2215,4910 -2215,5190 -2145,5260 -2145,5555 -1825,5875 v1(-1800,5875) ; v1(-1945,4350) -1945,4270 -1855,4180 -1780,4180 -1763.5,4163.5 -1259.71,4163.5 -1071.21,3975 CN9.43@-950,3975
PA3: CN9.42 RS2.4 U9.26 | length 2598.4
  TopLayer w7: v1(-2325,4655) -2148.79,4655 -1957.57,4463.78 -1863.78,4463.78 -1751.5,4351.5 -1151.5,4351.5 -1045,4245 -1045,4100 -970,4025 -900,4025 CN9.42@-850,4075 ; v1(-2225,5300) -2225,5325 -2215.75,5334.25 RS2.4@-2183.5,5334.25
  BottomLayer w7: v1(-2325,4655) -2325,4850 -2245,4930 -2245,5202.43 -2225,5222.43 v1(-2225,5300)
PA4: CN9.41 JP15.1 R83.2 U9.29 | length 4012.5
  TopLayer w7: R83.2@-3100,2977.5 -3100,3050 -3025,3125 -2925,3125 JP15.1@-2750,3300 -2750,3450 -2950,3650 -2950,3950 -2800,4100 v1(-2375,4100) ; v1(-2095,4630) -2085,4630 -1977.83,4522.83 -1842.17,4522.83 -1832.8,4532.2 -1782.2,4532.2 -1750,4500 -1750,4475 -1641.5,4366.5 -1141.5,4366.5 -1030,4255 -1030,4130 -975,4075 CN9.41@-950,4075
  BottomLayer w7: v1(-2375,4100) -2300,4175 -2300,4405.15 -2135,4570.15 -2135,4590 v1(-2095,4630)
PA5: CN9.40 R84.2 U9.30 | length 1312.2
  TopLayer w7: U9.30@-1895.87,4542.52 -1850,4542.52 -1845.32,4547.2 -1775.99,4547.2 -1653.79,4425 R84.2@-1602.5,4425 -1602.5,4407.5 -1576.5,4381.5 -1131.5,4381.5 -1015,4265 -1015,4165 -975,4125 -900,4125 CN9.40@-850,4175
PA6: CN9.38 R79.2 U9.31 | length 1328.8
  TopLayer w7: U9.31@-1895.87,4562.2 -1762.2,4562.2 -1653.5,4453.5 -1178.5,4453.5 -1000,4275 -1000,4250 -975,4225 -900,4225 CN9.38@-850,4275 ; v1(-1630,4525) R79.2@-1602.5,4525
  BottomLayer w7: v1(-1700,4500) -1675,4525 v1(-1630,4525)
PA7: CN9.37 R169.1 U9.32 | length 1224.5
  TopLayer w7: U9.32@-1895.87,4581.89 -1751.89,4581.89 -1638.5,4468.5 -1168.5,4468.5 -975,4275 CN9.37@-950,4275 ; v1(-1635,4625) R169.1@-1602.5,4625
  BottomLayer w7: v1(-1725,4555) -1655,4625 v1(-1635,4625)
PA8: CN8.6 JP4.3 TP6.1 U9.67 | length 4146.2
  TopLayer w7: CN8.6@-3550,5875 -3525,5875 -3355,5705 -3355,5430 -3225,5300 -2775,5300 -2750,5275 -2415,5275 -2278.74,5138.74 U9.67@-2278.74,5004.13
  BottomLayer w7: CN8.6@-3550,5875 -3425,5875 -3235,6065 -1510,6065 JP4.3@-1400,6175
PA9: CN8.7 R78.2 U9.68 | length 4502.9
  TopLayer w7: CN8.7@-3650,5775 -3600,5825 -3525,5825 -3370,5670 -3370,5420 -3225,5275 -2775,5275 -2750,5250 -2415,5250 -2298.43,5133.43 -2298.43,4948.43 -2125,4775 v1(-1975,4775) ; v1(-675,4450) R78.2@-627.5,4450
  BottomLayer w7: v1(-1975,4775) -1920,4720 -1920,4270 -1845,4195 -1770,4195 -1753.5,4178.5 -1248.5,4178.5 -1195,4125 -825,4125 -760,4190 -760,4365 v1(-675,4450)
PA10: CN8.8 R38.2 U9.69 | length 6184.5
  TopLayer w7: CN8.8@-3550,5775 -3525,5775 -3385,5635 -3385,5410 -3225,5250 -2775,5250 -2750,5225 -2415,5225 -2318.11,5128.11 U9.69@-2318.11,5004.13 ; v1(-675,4350) R38.2@-627.5,4350
  BottomLayer w7: v1(-2720,5225) -2735,5210 -2735,4643.79 -2805,4573.79 -2805,3947.9 -2543.6,3686.5 -2090.29,3686.5 -1993.79,3590 -1290,3590 -1175,3475 -900,3475 -745,3630 -745,4280 v1(-675,4350)
PA11: CN8.12 R42.2 U4.D3 U9.70 | length 5914
  TopLayer w7: CN8.12@-3550,5575 -3525,5575 -3430,5480 -3430,5380 -3225,5175 -2775,5175 -2750,5150 -2600,5150 -2585,5165 -2380,5165 -2337.8,5122.8 U9.70@-2337.8,5004.13 ; U4.D3@-629.53,3905.31 -624.84,3900.63 -624.84,3890 -634.68,3880.16 -655.16,3880.16 -680,3905 -680,3945 -620,4005 -530,4005 -500,3975 R42.2@-477.5,3975
  BottomLayer w7: v1(-2825,5175) -2825,5050 -2855,5020 -2855,4380 -2835,4360 -2835,3935.48 -2556.02,3656.5 -2106.5,3656.5 -2010,3560 -1310,3560 -1195,3445 -880,3445 -715,3610 -715,3860 v1(-675,3900)
PA12: CN8.13 R43.2 U4.C3 U9.71 | length 5858.3
  TopLayer w7: CN8.13@-3650,5475 -3600,5525 -3525,5525 -3445,5445 -3445,5370 -3225,5150 -2775,5150 -2750,5125 -2600,5125 -2575,5150 -2390,5150 -2357.48,5117.48 U9.71@-2357.48,5004.13 ; v1(-675,3850) v1(-550,3850) ; -610,3850 -609.84,3850.16 U4.C3@-609.84,3905.31 U4.C3@-608.38,3905.31 ; v1(-510,3890) R43.2@-475,3890
  BottomLayer w7: v1(-2850,5150) -2850,5050 -2870,5030 -2870,4370 -2850,4350 -2850,3929.26 -2562.24,3641.5 -2116.5,3641.5 -2020,3545 -1320,3545 -1205,3430 -870,3430 -700,3600 -700,3825 v1(-675,3850) ; v1(-550,3850) v1(-510,3890)
PA13: CN8.14 CN12.2 CN13.7 R121.1 U9.72 | length 5952.4
  TopLayer w7: CN8.14@-3565,5475 -3525,5475 -3460,5410 -3460,5360 -3225,5125 -2775,5125 -2750,5100 -2600,5100 -2565,5135 -2400,5135 -2377.17,5112.17 U9.72@-2377.17,5004.13 ; R121.1@-872.5,3375 v1(-825,3375) ; CN12.2@-520,3425 v1(-450,3425) -342.58,3317.58 -342.58,3192.58 CN13.7@-250,3100
  BottomLayer w7: v1(-2875,5125) -2875,5050 -2885,5040 -2885,4365 -2900,4350 -2900,3936.84 -2574.66,3611.5 -2136.5,3611.5 -2040,3515 -1340,3515 -1225,3400 -900,3400 -875,3375 -820,3375 -795,3400 -755,3400 -705,3450 -475,3450 v1(-450,3425)
PA14: CN8.16 CN12.4 CN13.9 R125.2 U9.76 | length 5688
  TopLayer w7: CN8.16@-3550,5375 -3525,5375 -3225,5075 -2775,5075 -2636.22,4936.22 U9.76@-2504.13,4936.22 ; R125.2@-1022.5,3375 -1000,3375 v1(-975,3350) ; CN12.4@-520,3375 v1(-450,3375) -357.58,3282.58 -357.58,3107.58 CN13.9@-250,3000
  BottomLayer w7: v1(-2900,5075) -2900,4375 -2925,4350 -2925,3940.62 -2580.88,3596.5 -2146.5,3596.5 -2050,3500 -1350,3500 -1200,3350 -475,3350 v1(-450,3375)
PA15: CN8.20 CN12.8 CN13.5 R123.1 U9.77 | length 6133.4
  TopLayer w7: v1(-3425,5175) -3300,5050 -2775,5050 -2641.54,4916.54 U9.77@-2504.13,4916.54 ; R123.1@-872.5,3275 v1(-825,3275) -800,3300 -800,3435 -775,3460 -435,3460 -325,3350 -325,3275 CN13.5@-250,3200 ; CN12.8@-520,3275 v1(-450,3275)
  BottomLayer w7: CN8.20@-3550,5175 v1(-3425,5175) ; v1(-2950,5050) -2950,4375 -2975,4350 -2975,3948.2 -2593.3,3566.5 -2166.5,3566.5 -2070,3470 -1370,3470 -1250,3350 -1250,3275 -1225,3250 -950,3250 -925,3275 v1(-450,3275)
PB0: CN9.34 R167.1 U9.35 | length 1403.3
  TopLayer w7: U9.35@-1895.87,4640.94 -1710.94,4640.94 -1650,4580 -1155,4580 -1000,4425 -900,4425 CN9.34@-850,4475 ; v1(-1635,4825) R167.1@-1602.5,4825
  BottomLayer w7: v1(-1709.06,4640.94) -1675,4675 -1675,4785 v1(-1635,4825)
PB1: CN9.33 R168.1 U9.36 | length 1356.6
  TopLayer w7: U9.36@-1895.87,4660.63 -1700.63,4660.63 -1663.83,4623.84 -1635,4595 -1145,4595 -1025,4475 CN9.33@-950,4475 ; v1(-1635,4925) R168.1@-1602.5,4925
  BottomLayer w7: v1(-1724.37,4660.63) -1700.63,4684.37 -1700.63,4859.37 v1(-1635,4925)
PB2: CN9.32 CN14.1 CN15.1 R60.1 U9.37 | length 5148.1
  TopLayer w7: R60.1@-2872.5,4575 -2850,4575 -2825,4550 v1(-2695,4550) ; v1(-2400,4625) -2350,4675 -2105,4675 -2070,4640 -1970.32,4640 -1930,4680.32 -1656.32,4680.32 -1642.5,4666.5 -1091.5,4666.5 -1000,4575 -1000,4550 -975,4525 -900,4525 CN9.32@-850,4575 ; CN15.1@-1101.06,2287.72 -738.06,2650.72 CN14.1@-738.06,2688.72
  BottomLayer w7: v1(-2695,4550) -2475,4550 v1(-2400,4625) ; CN9.32@-850,4575 -750,4575 -640,4465 -640,3590 -610,3560 -510,3560 -410,3460 -410,2915 -575,2750 -676.78,2750 CN14.1@-738.06,2688.72
PB3: CN8.33 CN12.6 CN13.13 R119.2 R122.1 U9.89 | length 6338.4
  TopLayer w7: CN8.33@-3650,4475 -3600,4525 -3525,4525 -3500,4550 -3500,4625 -3375,4750 -2775,4750 -2705.32,4680.32 U9.89@-2504.13,4680.32 ; R119.2@-1077.5,3075 -1077.5,3112.5 -1065,3125 -890,3125 -872.5,3142.5 R122.1@-872.5,3175 ; CN12.6@-520,3325 v1(-450,3325) -375,3250 -375,2925 CN13.13@-250,2800
  BottomLayer w7: v1(-2975,4750) -2966.89,4741.89 -2966.89,4383.11 -3025,4325 -3025,3955.77 -2605.73,3536.5 -2186.5,3536.5 -2090,3440 -1390,3440 -1280,3330 -1280,3180 -1225,3125 v1(-900,3125) -875,3150 -440,3150 -425,3165 -425,3300 v1(-450,3325)
PB4: CN8.34 CN13.3 JP20.1 R120.2 R124.1 U9.90 | length 5684.6
  TopLayer w7: CN8.34@-3550,4475 -3525,4475 -3485,4515 -3485,4590 -3350,4725 -2775,4725 -2710.63,4660.63 U9.90@-2504.13,4660.63 ; JP20.1@-1200,3300 -1150,3300 -1125,3275 R124.1@-1077.5,3275 ; R120.2@-872.5,3075 -845,3075 -825,3095 -825,3200 -850,3225 -1050,3225 -1077.5,3252.5 -1077.5,3302.5 -1055,3325 -910,3325 -900,3335 -900,3400 -825,3475 -400,3475 -300,3375 -300,3350 CN13.3@-250,3300
  BottomLayer w7: v1(-2925,4725) -2925,4375 -2950,4350 -2950,3944.41 -2587.09,3581.5 -2156.5,3581.5 -2060,3485 -1360,3485 -1200,3325 JP20.1@-1200,3300
PB5: CN8.35 R45.2 TP4.1 U9.91 | length 3029.1
  TopLayer w7: CN8.35@-3650,4375 -3600,4425 -3525,4425 -3470,4480 -3470,4555 -3325,4700 -2825,4700 -2765.94,4640.94 U9.91@-2504.13,4640.94 ; R45.2@-2947.5,5425 v1(-2900,5425)
  BottomLayer w7: CN8.35@-3640,4385 -3600,4425 -3525,4425 -3500,4450 -3500,5000 -3370,5130 -3370,5305 -3205,5470 -2945,5470 v1(-2900,5425)
PB6: CN8.36 JP9.1 U6.1 U9.92 | length 5067
  TopLayer w7: CN8.36@-3550,4375 -3530,4375 -3455,4450 -3455,4520 -3300,4675 -2858.74,4675 -2805,4621.26 U9.92@-2504.13,4621.26 ; v1(-3200,5425) -3200,5450 -3175,5475 -3150,5475 -3125,5500 U6.1@-3125,5537.5 ; v1(-1750,3700) -1730,3680 -1730,3430 -1700,3400 JP9.1@-1700,3300
  BottomLayer w7: CN8.36@-3550,4375 -3525,4375 -3485,4415 -3485,4990 -3355,5120 -3355,5270 v1(-3200,5425) ; v1(-2650,4621.26) -2671.26,4600 -2672.72,4600 -2720,4552.72 -2720,4520 -2450,4250 -2450,4200 -2475,4175 -2595,4175 -2675,4095 -2675,3881.54 -2524.96,3731.5 -1906.5,3731.5 -1875,3700 v1(-1750,3700)
PB7: CN8.37 R132.2 U9.93 | length 4037.6
  TopLayer w7: CN8.37@-3650,4275 -3595,4330 -3520,4330 -3440,4410 -3440,4485 -3275,4650 -2860,4650 -2811.57,4601.57 U9.93@-2504.13,4601.57 ; R132.2@-1825,2977.5 v1(-1825,3025)
  BottomLayer w7: v1(-3200,4650) -3200,4325 -3225,4300 -3225,3986.07 -2655.43,3416.5 -2266.5,3416.5 -2115,3265 -2115,3040 -2075,3000 -1850,3000 v1(-1825,3025)
PB8: CN8.45 RS1.6 U9.95 | length 2512.7
  TopLayer w7: CN8.45@-3650,3875 -3600,3925 -3525,3925 -3325,4125 v1(-3275,4125) ; v1(-3275,4325) -2891.89,4325 -2650,4566.89 -2549.69,4566.89 -2545,4562.2 -2375,4562.2 -2352.8,4540 v1(-2325,4540) ; v1(-2080,5070) -2040.75,5109.25 -2020.75,5109.25 -2015.75,5114.25 RS1.6@-2015.75,5141.5
  BottomLayer w7: v1(-3275,4125) v1(-3275,4325) ; v1(-2325,4540) -2271.21,4540 -2210,4601.21 -2210,4840 -2125,4925 -2125,5025 v1(-2080,5070)
PB9: CN8.46 R104.2 U9.96 | length 3405.6
  TopLayer w7: CN8.46@-3560,3870 -3530,3870 -3300,4100 v1(-3200,4100) ; v1(-3150,4300) -2880,4300 -2660,4520 -2660,4531.89 -2640,4551.89 -2555.9,4551.89 -2546.53,4542.52 U9.96@-2504.13,4542.52 ; R104.2@-1925,2977.5 v1(-1925,3025)
  BottomLayer w7: v1(-3150,4300) -3200,4250 -3200,3982.28 -2649.22,3431.5 -2256.5,3431.5 -2100,3275 -2100,3050 -2075,3025 v1(-1925,3025)
PB10: CN9.18 RS2.6 U9.47 | length 2000.3
  TopLayer w7: RS2.6@-2184.25,5365 RS2.6@-2183.5,5365.75 -2155.75,5365.75 -2150,5360 -2150,5250 -2075,5175 -1940,5175 -1925,5160 v1(-1925,5140) ; U9.47@-1895.87,4877.17 -1747.83,4877.17 -1705,4920 -1705,4970 -1620,5055 -1485,5055 -1465,5075 -1125,5075 -975,5225 -900,5225 CN9.18@-850,5275
  BottomLayer w7: v1(-1925,5140) -1925,5100 -1760,4935 v1(-1760,4877.17)
PB11: CN9.17 RS3.6 U9.48 | length 1350.7
  TopLayer w7: U9.48@-1895.87,4896.85 -1826.85,4896.85 -1825,4895 -1775,4895 -1725,4945 v1(-1725,4975) -1630,5070 -1505,5070 -1475,5100 -1150,5100 -975,5275 CN9.17@-950,5275 ; RS3.6@-1840.75,5141.5 -1840.75,5115.75 v1(-1825,5100)
  BottomLayer w7: v1(-1825,5100) -1825,5050 -1750,4975 v1(-1725,4975)
PB12: CN9.16 RS3.4 U9.51 U13.40 | length 7211.7
  TopLayer w7: U13.40@-2662.01,1788.58 -2646.42,1788.58 -2635,1800 -2635,2030 -2585,2080 -2455,2080 v1(-2425,2050) ; U9.51@-1963.78,5004.13 -1963.78,5036.22 -1915,5085 -1885,5085 -1850,5050 -1675,5050 -1640,5085 -1515,5085 -1475,5125 -1175,5125 -975,5325 -900,5325 CN9.16@-850,5375 ; RS3.4@-1809.25,5141.5 -1809.25,5114.25 -1800,5105 v1(-1800,5100)
  BottomLayer w7: v1(-2425,2050) -2300,1925 -1775,1925 -1153.81,2546.19 -578.81,2546.19 -350,2775 -350,3600 -455,3705 -455,3926.21 -470,3941.21 -470,4395 -595,4520 -595,5120 CN9.16@-850,5375 ; v1(-1800,5100) -1800,5075 v1(-1775,5050)
PB13: CN9.15 RS3.2 U9.52 U13.38 | length 7358.5
  TopLayer w7: U13.38@-2662.01,1749.21 -2635,1749.21 -2600,1784.21 -2600,2010 -2560,2050 -2500,2050 v1(-2350.03,1900.03) ; U9.52@-1983.46,5004.13 -1983.46,5041.54 -1925,5100 -1875,5100 -1845,5070 -1680,5070 -1650,5100 -1525,5100 -1475,5150 -1200,5150 -975,5375 CN9.15@-950,5375 ; -1785,5070 -1775,5080 -1765,5070 ; -1775,5070 RS3.2@-1775,5138.74
  BottomLayer w7: v1(-2350.03,1900.03) -1774.97,1900.03 -1143.81,2531.19 -543.81,2531.19 -335,2740 -335,3610 -440,3715 -440,3932.43 -455,3947.43 -455,4405 -580,4530 -580,5180 -825,5425 -900,5425 CN9.15@-950,5375
PB14: CN9.14 R159.1 U9.53 | length 5994.1
  TopLayer w7: U9.53@-2003.15,5004.13 -2003.15,5043.15 -1931.3,5115 -1920,5115 -1900,5135 -1900,5160 -1885,5175 -1225,5175 -975,5425 -900,5425 CN9.14@-850,5475 ; R159.1@-1525,2977.5 -1502.5,2977.5 -1175,2650 -1005,2650 -950,2595 v1(-950,2500)
  BottomLayer w7: v1(-950,2500) -885,2435 -595,2435 -320,2710 -320,3620 -425,3725 -425,3938.64 -440,3953.64 -440,4415 -565,4540 -565,5215 -825,5475 CN9.14@-860,5475
PB15: CN9.13 U9.54 U13.39 | length 7900.8
  TopLayer w7: U13.39@-2662.01,1768.9 -2640,1768.9 -2620,1788.9 -2620,2015 -2570,2065 -2480,2065 v1(-2290,1875) ; U9.54@-2022.83,5004.13 -2022.83,4952.83 -2015,4945 v1(-1970,4945)
  BottomLayer w7: v1(-2290,1875) -1775,1875 -1310,2340 -605,2340 -305,2640 -305,3630 -410,3735 -410,3944.85 -425,3959.85 -425,4425 -550,4550 -550,5250 -825,5525 -875,5525 -925,5475 -1025,5475 -1075,5425 -1075,5225 -1210,5090 -1620,5090 -1710,5180 -1920,5180 -1945,5155 -1945,4970 v1(-1970,4945)